# Altium PCB Morpheus_pill.PcbDoc
Units mm, origin at the board's own origin, x right, y up, seen from the top; angles counter-clockwise.
Board outline 20.57 x 20.57 mm, 4 copper layers (TOP, GND, SIG, BOT), stack 0.776 mm thick; 80 components, 67 nets, 256 pads, 130 vias.
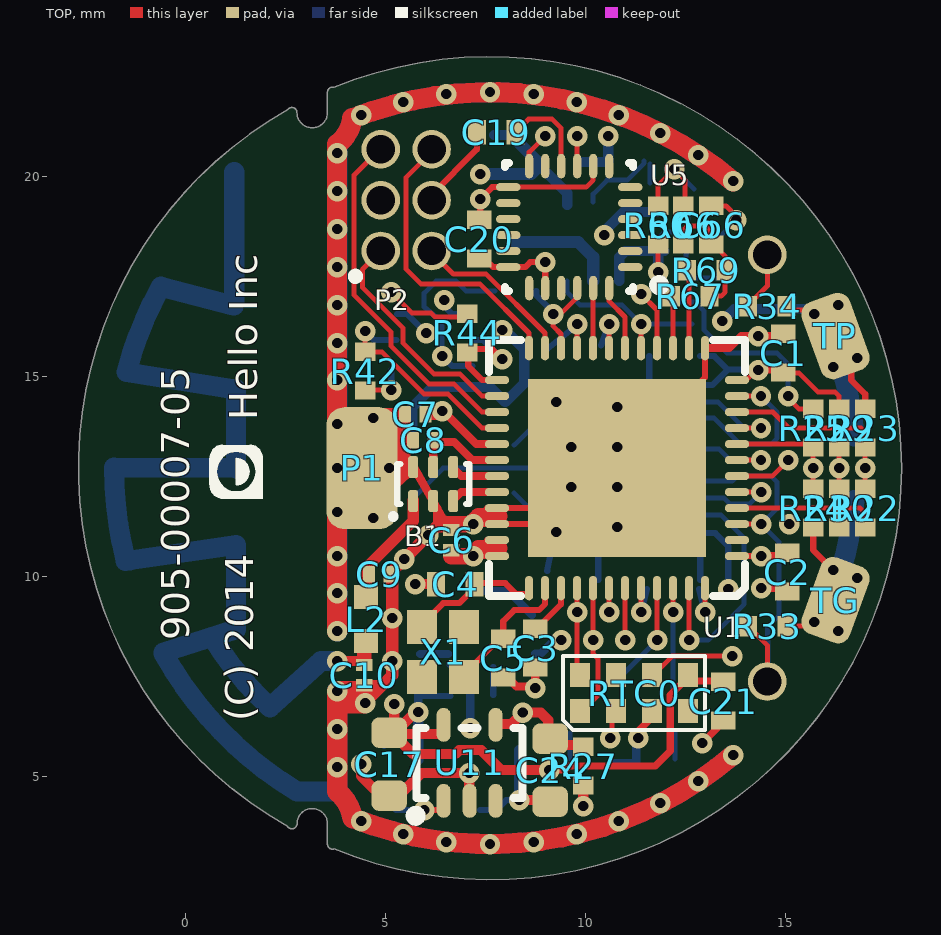
[diagram p0: TOP view]
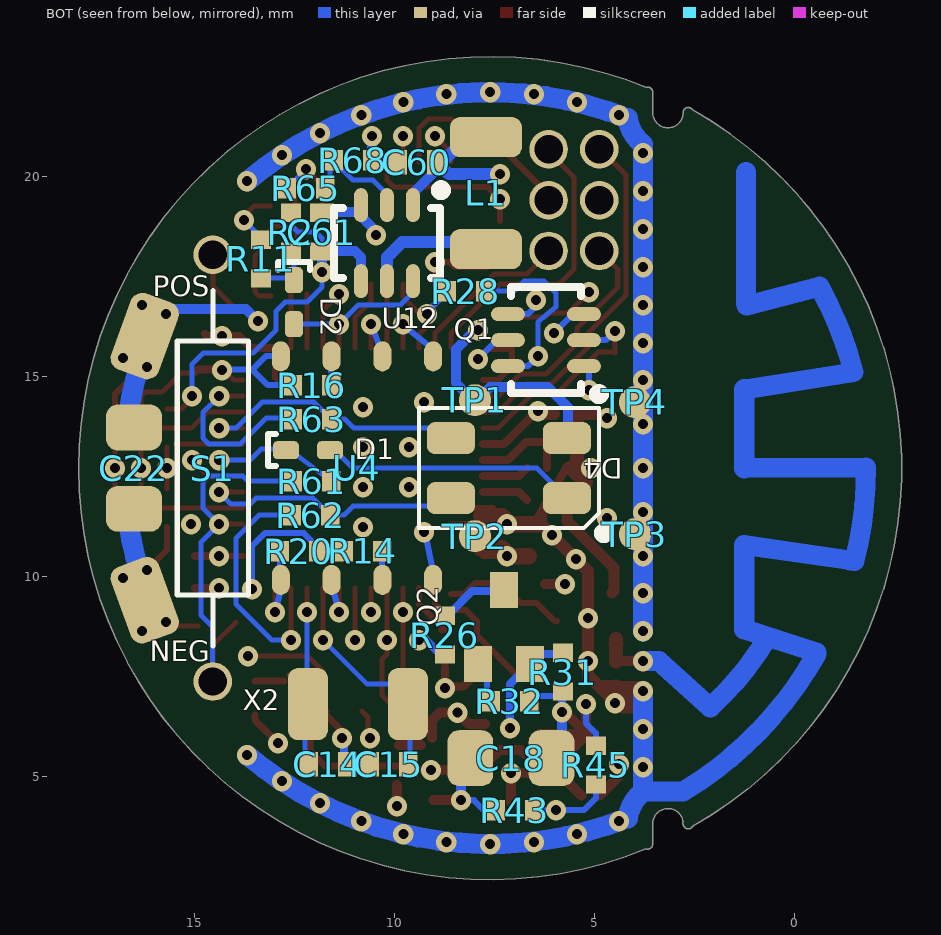
[diagram p1: BOT view, seen from below]
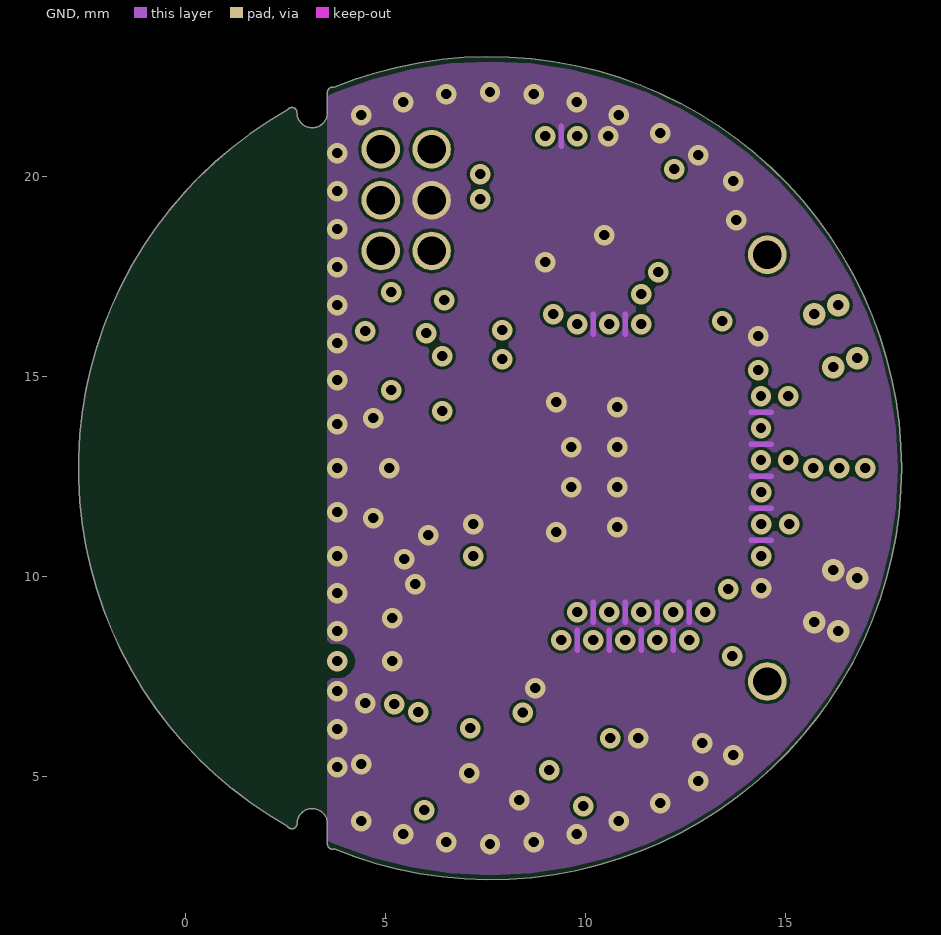
[diagram p2: GND]
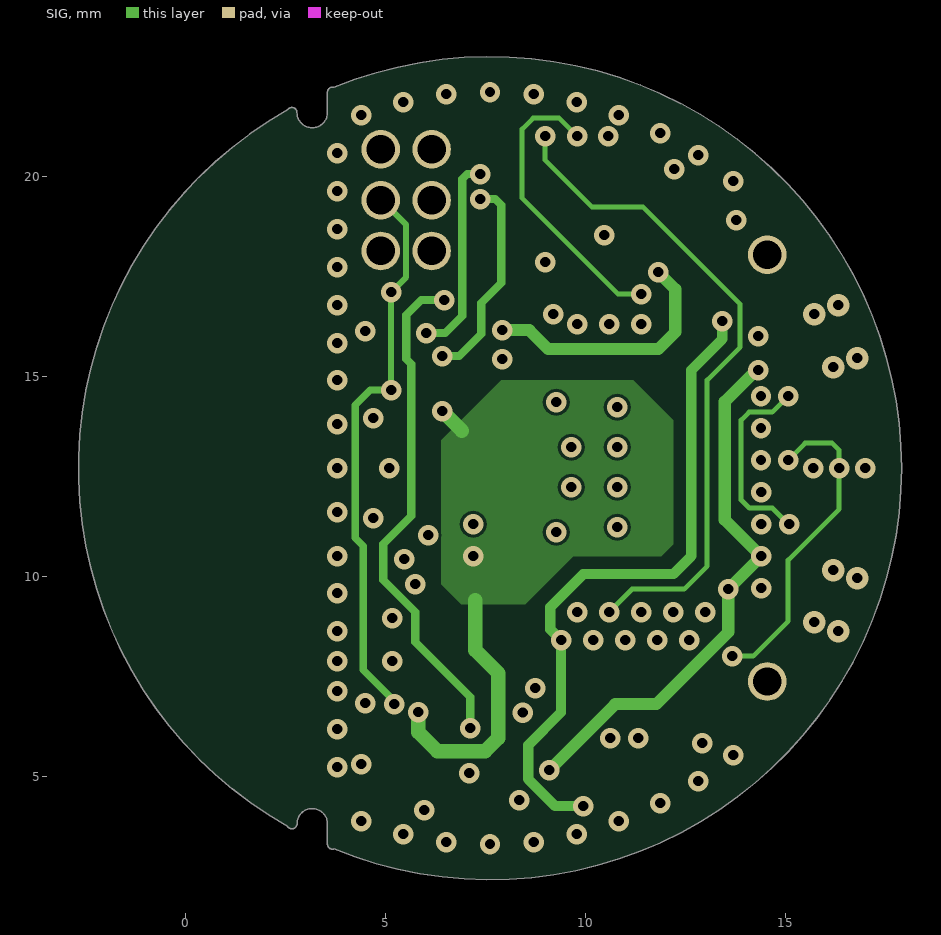
[diagram p3: SIG]

## Layer stack, top to bottom
Top Solder: solder mask 0.0102, Solder Resist, Dk 3.5
TOP: signal copper 0.0356
Dielectric1: prepreg 0.252, FR-4, Dk 4.8
GND: signal copper 0.0356
Dielectric2: core 0.13, FR-4, Dk 4.8
SIG: signal copper 0.0356
Dielectric3: prepreg 0.252, FR-4, Dk 4.8
BOT: signal copper 0.0356
Bottom Solder: solder mask 0.0102, Solder Resist, Dk 3.5

## Board outline
2.558,3.744 cw(c7.62,12.7) 2.558,21.656 cw(c2.667,21.59) 2.794,21.59 ccw(c3.175,21.59) 3.556,21.59 3.556,22.098 cw(c3.683,22.098) 3.721,22.22 cw(c7.62,12.7) 17.907,12.7 cw(c7.62,12.7) 3.721,3.18 cw(c3.683,3.302) 3.556,3.302 3.556,3.81 ccw(c3.175,3.81) 2.798,3.859 cw(c2.675,3.825) 2.802,3.825 cw(c2.675,3.825) 2.782,3.755 cw(c2.667,3.81)

## Design rules (kind name [scope] priority, off if disabled: settings)
Clearance "Gnd Polygon" [OnLayer('GND')] p1: gap=0.076
Clearance [All] p2: gap=0.075
ComponentClearance [All] p1: gap=0.127 collisioncheckmode=3 verticalgap=0.127 showdistances=FALSE
FabricationTestPointUsage TestPointUsage [All] p1: valid=0 allowmultiple=FALSE
FabricationTestpoint Testpoint [All] p1: side=3 testpointundercomponent=TRUE minsize=1.016 maxsize=2.54 preferedsize=1.524 minholesize=0 maxholesize=1.016 preferedholesize=0.813 testpointgrid=0.025 allowsidetop=TRUE allowsidebottom=TRUE usegrid=TRUE gridtolerance=0
HoleSize [All] p1: absolutevalues=TRUE maxlimit=6.35 minlimit=0.076 maxpercent=80.000 minpercent=20.000
MinimumAnnularRing [All] p1: minimumring=0.051
PasteMaskExpansion [All] p1: expansion=-0.025
PlaneClearance [All] p1: clearance=0.203
PlaneConnect [All] p1: planeconnectstyle=Direct reliefexpansion=0.635 reliefentries=4 reliefconductorwidth=0.508 reliefairgap=0.254
PolygonConnect [All] p1: connectstyle=Direct reliefconductorwidth=0.381 reliefentries=4 polygonreliefangle="45 Angle" airgapwidth=0.254
RoutingLayers [All] p1: top layer_v5=TRUE mid layer 1_v5=TRUE mid layer 2_v5=FALSE bottom layer_v5=TRUE
RoutingVias [All] p1: holewidth=0.305 width=0.559 viastyle="Through Hole" minholewidth=0.076 minwidth=0.203 maxholewidth=1.651 maxwidth=2.54
SilkToSolderMaskClearance SilkscreenOverComponentPads [IsPad] p1: minsilkscreentomaskgap=0.254 clearancetoexposedcopper=TRUE
SolderMaskExpansion [All] p1: expansion=0.076
Width [All] p1: maxlimit=10.16 minlimit=0.076 preferedwidth=0.254 toplayer_maxwidth=2.54 midlayer2_maxwidth=2.54 bottomlayer_maxwidth=5.08 minimp=50.000000 maximp=50.000000 favimp=50.000000
20 further rules are at their usual default settings.

## Classes and differential pairs
component class Power: C17 C18 C22 C24 C60 C61 C66 D1 D2 D4 L1 NEG POS Q1 Q2 R2 R11 R26 R27 R31 R32 R33 R34 R42 R43 R44 R45 R60 R61 R62 R63 R65 R66 R67 R68 R69 S1 TG TP TP1 TP2 TP3 TP4 U11 U12
component class Motion: C19 C20 R28 U5
component class Morpheus_pill: C9 C10 L2 P1 R14 R16 R20 R22 R23 R24 R25 R29 R30 U4
component class Bluetooth: B1 C1 C2 C3 C4 C5 C6 C7 C8 C14 C15 C21 P2 RTC0 U1 X1 X2

## Components (designator, comment, footprint, x,y, rotation, side; value= is the part's Value field where it differs from the comment)
B1 "2450BM14E0003" DFN50P160X80X70-6N 6.2,12.3 r90 top locked
C1 "0.1u" CAP0402_SENSE_DVT 14.95,15.575 r270 top
C2 "0.1u" CAP0402_SENSE_DVT 15.05,10.1 r90 top
C3 "0.1u" CAP0402_SENSE_DVT 8.75,8.2 r90 top
C4 "12p" CAP0402_SENSE_DVT 6.75,9.8 r0 top
C5 "12p" CAP0402_SENSE_DVT 7.95,7.95 r90 top
C6 "1000p" CAP0201_SENSE_DVT 6.65,10.9 r270 top
C7 "C_0.047u_10_16_X5R_0201" CAP0201_SENSE_DVT 5.75,14.05 r0 top
C8 "2200p" CAP0201_SENSE_DVT 5.95,13.4 r0 top
C9 "DNP" CAP0201_SENSE_DVT 4.85,10.05 r0 top
C10 "" CAP0201_SENSE_DVT 4.475,7.525 r270 top
C14 "12p" CAP0402_SENSE_DVT 11.675,5.3 r0 bottom
C15 "12p" CAP0402_SENSE_DVT 10.15,5.3 r180 bottom
C17 "4.7u" CAP0603_SENSE_DVT 5.1,5.3 r90 top locked
C18 "47u" CAP0805_SENSE_DVT 7.1,5.45 r180 bottom
C19 "0.1u" CAP0402_SENSE_DVT 7.775,21.1 r0 top
C20 "0.1u" CAP0402_SENSE_DVT 7.35,18.425 r90 top
C21 "DNP" CAP0402_SENSE_DVT 13.45,6.875 r90 top
C22 "47u" CAP0805_SENSE_DVT 16.525,12.7 r90 bottom
C24 "4.7u" CAP0603_SENSE_DVT 9.125,5.15 r90 top
C60 "1u" CAP0402_SENSE_DVT 9.45,20.35 r180 bottom
C61 "1u" CAP0402_SENSE_DVT 11.825,18.6 r270 bottom
C66 "0.01uF" CAP0402_SENSE_DVT 13.15,18.775 r270 top
D1 "DNP" SOD523 12.175,13.15 r180 bottom
D2 "DNP" SOD523 12.525,16.85 r270 bottom
D4 "DNP" PLCC150X290P280X320X190-4 7.15,12.7 r180 bottom
L1 "DNP" IND_1206 7.725,19.575 r270 bottom locked
L2 "" IND_0402 4.525,8.925 r270 top
NEG "DNP" TP0875x050#1 19.525,4.5 r180 bottom (schematic designator BG)
P1 "Contact Spring" TP120X70SC 4.5,12.85 r90 top locked
P2 "DNP" HDR1.27-2X3-N 5.525,19.4 r270 top locked
POS "DNP" TP0875x050#2 22.3,4.2 r180 bottom (schematic designator BP)
Q1 "NTJD4152PT1G" SOT65P212X110-6N 6.225,15.9 r0 bottom locked
Q2 "DNP" SOT-323 7.275,8.725 r180 bottom locked
R2 "DNP" RES0402_SENSE_DVT 12.6,18.6 r270 bottom
R11 "DNP" RES0402_SENSE_DVT 13.35,17.925 r270 bottom
R14 "DNP" RES0402_SENSE_DVT 10.8,10.625 r0 bottom
R16 "DNP" RES0402_SENSE_DVT 12.075,14.775 r0 bottom
R20 "DNP" RES0402_SENSE_DVT 12.4,10.625 r180 bottom
R22 "215K" RES0402_SENSE_DVT 17,11.7 r90 top
R23 "523k" RES0402_SENSE_DVT 17,13.7 r90 top
R24 "215K" RES0402_SENSE_DVT 15.7,11.7 r90 top
R25 "523k" RES0402_SENSE_DVT 15.7,13.7 r90 top
R26 "DNP" RES0402_SENSE_DVT 8.75,8.525 r90 bottom
R27 "10" RES0402_SENSE_DVT 9.95,5.25 r90 top
R28 "510K" RES0402_SENSE_DVT 8.225,17.125 r180 bottom
R29 "523k" RES0402_SENSE_DVT 16.35,13.7 r90 top
R30 "523k" RES0402_SENSE_DVT 16.35,11.7 r90 top
R31 "" RES0402-SENSE-DVT 5.8,7.6 r270 bottom
R32 "DNP" RES0402_SENSE_DVT 7.125,6.875 r180 bottom
R33 "1.3M" RES0402_SENSE_DVT 14.55,8.75 r180 top
R34 "1.3M" RES0402_SENSE_DVT 14.55,16.75 r0 top
R42 "1.3M" RES0402_SENSE_DVT 4.5,15.125 r270 top
R43 "DNP" RES0402_SENSE_DVT 7,4.15 r180 bottom
R44 "1.3M" RES0402_SENSE_DVT 7.05,16.075 r90 top
R45 "DNP" RES0402_SENSE_DVT 4.975,5.275 r90 bottom
R60 "499k" RES0402_SENSE_DVT 11.825,18.775 r270 top
R61 "511" RES0402_SENSE_DVT 12.075,12.375 r180 bottom
R62 "511" RES0402_SENSE_DVT 12.1,11.525 r180 bottom
R63 "511" RES0402_SENSE_DVT 12.075,13.925 r180 bottom
R65 "499k" RES0402_SENSE_DVT 12.225,19.7 r0 bottom
R66 "499k" RES0402_SENSE_DVT 12.45,18.775 r90 top
R67 "100k" RES0402_SENSE_DVT 12.625,17 r0 top
R68 "294k" RES0402_SENSE_DVT 11.05,20.4 r0 bottom
R69 "294k" RES0402_SENSE_DVT 13.025,17.65 r0 top
RTC0 "DNP" 8-CLCC 11.225,7.075 r0 top locked
S1 "REED_SPST_NO" REED-10x1.8 14.554,12.7 r270 bottom locked
TG "DNP" TP0875x050#3 19.625,9.075 r180 top
TP "DNP" TP0875x050#4 20.275,16.3 r180 top
TP1 "DNP" TP-0.8 8,14.4 r90 bottom
TP2 "DNP" TP-0.8 8,11 r90 bottom
TP3 "DNP" TP-0.8 4,11.05 r0 bottom
TP4 "DNP" TP-0.8 4,14.35 r90 bottom
U1 "nRF51422-QFAA" VQFN40P600X600X100-48 10.795,12.7 r180 top locked
U4 "DNP" DFN127P600x500x80-8D 10.95,12.7 r90 bottom locked
U5 "InvenSense MPU-6500" QFN-24 9.6,18.725 r180 top locked
U11 "TPS79718DCK" SOT65P212X110-5N 7.112,5.334 r90 top locked
U12 "DNP" SOT65P212X110-6N 10.2,18.325 r270 bottom locked
X1 "ILCX19" ILCX19 5.55,9.15 r270 top
X2 "FC-135 32.7680KA-AC3" Epson_FC-135 10.925,6.8 r180 bottom locked

## Footprints (in the part's own frame and the unit in brackets; to place one, negate y for a bottom-side part, rotate by r counter-clockwise, add the part's x,y. Pads: shape width x height; smd on the part's side, far side on the other; paste and mask are expansions set on the pad)
8-CLCC [mm] "8 lead CLCC package, 2.3 x 1.5mm"
  rect 0.5x0.6 smd: 1(-1.35,-0.45) 2(-0.45,-0.45) 3(0.45,-0.45) 4(1.35,-0.45) 5(1.35,0.45) 6(0.45,0.45) 7(-0.45,0.45) 8(-1.35,0.45)
  silkscreen extent -1.78,-0.92 1.78,0.92, body extent -1.6,-0.75 1.6,0.75, height 0.8
CAP0201_SENSE_DVT [mil] "Chip Capacitor, 2-Leads, Body 0201 / 0.60x0.30mm, IPC High Density"
  rect 12x16 smd mask+1.97: 1(-10,0) 2(10,0)
  body extent -12,-6 12,6, height 13
CAP0402_SENSE_DVT [mil] "Chip Capacitor, 2-Leads"
  rect 18x24 smd: 1(-19,0) 2(19,0)
  body extent -21,-11 21,11, height 22
CAP0603_SENSE_DVT [mil] "Chip Capacitor, 2-Leads"
  rrect50% 30x35 smd: 1(-31,0) 2(31,0)
  body extent -31,-16 32,16, height 31
CAP0805_SENSE_DVT [mil] "Chip Capacitor, 2-Leads"
  rrect50% 45x55 smd: 1(-40,0) 2(40,0)
  body extent -39,-25 39,25, height 20
DFN50P160X80X70-6N [mm] "DFN, 6-Leads, body 1.6x0.8mm (max), Pitch 0.50mm"
  rrect50% 0.55x0.25 smd: 1(-0.425,0.5) 2(-0.425,0) 3(-0.425,-0.5) 4(0.425,-0.5) 5(0.425,0) 6(0.425,0.5)
  silkscreen extent -0.83,-0.9 0.5,1, body extent -0.41,-0.8 0.41,0.8, height 0.62
DFN127P600x500x80-8D [mm] "WSON 8L 6.0x5.0x0.8mm"
  oval 0.75x0.45 smd: 1(-2.794,1.905) 2(-2.794,0.635) 3(-2.794,-0.635) 4(-2.794,-1.905) 5(2.794,-1.905) 6(2.794,-0.635) 7(2.794,0.635) 8(2.794,1.905)
Epson_FC-135 [mm] "Epson Crystal FC-135 series"
  rrect50% 1x1.8 smd: 1(-1.25,0) 2(1.25,0)
  body extent -1.6,-0.75 1.6,0.75, height 1.1
HDR1.27-2X3-N [mil] "CONNECTOR, PCB, 2X3, 1.27MM, VERT, TH"
  round 38 hole 28 paste-39.37: 1(50,-25) 2(50,25) 3(0,-25) 4(0,25) 5(-50,-25) 6(-50,25)
  silkscreen extent 72,-53 78,-47
ILCX19 [mm] "ILSI ILCX19 Crystal Oscillator 2.0 x 1.6 x 0.45mm"
  rect 0.85x0.75 smd: 1(0.425,0.375) 2(1.675,0.375) 3(1.675,1.425) 4(0.425,1.425)
  body extent 0.05,0.1 2.05,1.7, height 0.45
IND_0402 [mm] "Chip Inductor, 2-Leads, Body 1.00x0.50mm, IPC Medium Density"
  rect 0.6x0.6 smd mask+0.05: 1(-0.55,0) 2(0.55,0)
  body extent -0.52,-0.28 0.53,0.27, height 0.55
IND_1206 [mm] "Chip Inductor, 2-Leads, Body 1206 / 3.20x1.60mm, IPC High Density"
  rrect50% 1x1.8 smd: 1(-1.4,0) 2(1.4,0)
  body extent -1.63,-0.8 1.65,0.8, height 1.6
PLCC150X290P280X320X190-4 [mm] "PLCC, 4-Leads, body 0.280x0.320mm (max), Pitch 1.50x2.90mm,  Height 1.90mm"
  rrect50% 1.2x0.8 smd: 1(1.45,-0.75) 2(1.45,0.75) 3(-1.45,0.75) 4(-1.45,-0.75)
  silkscreen extent -2.25,-1.75 2.5,1.5, body extent -1.6,-1.4 1.6,1.4, height 2
QFN-24 [mm]
  oval 0.61x0.203 smd: 1(-1.525,1) 2(-1.525,0.6) 3(-1.525,0.2) 4(-1.525,-0.2) 5(-1.525,-0.6) 6(-1.525,-1) 13(1.525,-1) 14(1.525,-0.6) 15(1.525,-0.2) 16(1.525,0.2) 17(1.525,0.6) 18(1.525,1)
  oval 0.203x0.61 smd: 7(-1,-1.525) 8(-0.6,-1.525) 9(-0.2,-1.525) 10(0.2,-1.525) 11(0.6,-1.525) 12(1,-1.525) 19(1,1.525) 20(0.6,1.525) 21(0.2,1.525) 22(-0.2,1.525) 23(-0.6,1.525) 24(-1,1.525)
  TOP pour cut-out: -1.35,1.35 -1.35,-1.35 1.35,-1.35 1.35,1.35
  silkscreen extent -2.38,-1.6 1.6,1.6, body extent -1.45,-1.45 1.45,1.45, height 0.95
REED-10x1.8 [mil]
  round 38 hole 28 paste-39.37: 1(-210,0) 2(210,0)
  silkscreen extent -175,-35 175,35
RES0402-SENSE-DVT [mil] "Chip resistor 0402"
  rect 18x20 smd: 1(-19,0) 2(19,0)
  body extent -24,-8 24,8, height 20
RES0402_SENSE_DVT [mil] "Chip resistor 0402"
  rect 18x20 smd: 1(-19,0) 2(19,0)
  body extent -24,-8 24,8, height 20
SOD523 [mm] "Diode small package"
  rrect50% 0.65x0.45 smd: 1(-0.55,0) 2(0.55,0)
  silkscreen extent -1,-0.4 -0.8,0.4, body extent -0.6,-0.4 0.6,0.4, height 0.65
SOT65P212X110-5N [mm] "SOT23, 5-Leads, Body 2.3x2.3mm (max), Pitch 0.65mm, IPC Medium Density"
  oval 0.85x0.35 smd: 1(-0.95,0.65) 2(-0.95,0) 3(-0.95,-0.65) 4(0.95,-0.65) 5(0.95,0.65)
  silkscreen extent -1.45,-1.33 0.88,1.47, body extent -0.67,-1.12 0.67,1.13, height 1.1
SOT65P212X110-6N [mm] "SOT23, 6-Leads, Body 2.3x2.3mm (max), Pitch 0.65mm, IPC Medium Density"
  oval 0.85x0.35 smd: 1(-0.95,0.65) 2(-0.95,0) 3(-0.95,-0.65) 4(0.95,-0.65) 5(0.95,0) 6(0.95,0.65)
  silkscreen extent -1.45,-1.33 0.87,1.47, body extent -0.67,-1.12 0.67,1.13, height 1.1
SOT-323 [mm]
  rect 0.7x0.9 smd paste-0.05: 1(-0.65,-0.925) 2(0.65,-0.925) 3(0,0.925)
  body extent -1.1,-0.8 1.1,0.8, height 1.1
TP120X70SC [mm] "Test Pad 120x70 mils (for spring contact)"
  rrect50% 3.048x1.778 smd mask-0.1: 1(-0.15,0.08)
TP0875x050#1 [mil] "Test Pad 0.875x0.50mm"
  rrect50% 50x80 smd rot 20 paste-40: 1(128.7,192.83)
TP0875x050#2 [mil] "Test Pad 0.875x0.50mm"
  rrect50% 50x80 smd rot 160 paste-40: 1(237.95,464.65)
TP0875x050#3 [mil] "Test Pad 0.875x0.50mm"
  rrect50% 50x80 smd rot 160 paste-40: 1(132.64,-12.72)
TP0875x050#4 [mil] "Test Pad 0.875x0.50mm"
  rrect50% 50x80 smd rot 20 paste-40: 1(158.23,11.73)
TP-0.8 [mm] "0.8mm test point"
  round 0.8 smd paste-1 mask-1: 1(0,0)
VQFN40P600X600X100-48 [mm]
  rect 4.445x4.445 smd: 0(0,0)
  oval 0.61x0.203 smd: 1(-3,2.2) 2(-3,1.8) 3(-3,1.4) 4(-3,1) 5(-3,0.6) 6(-3,0.2) 7(-3,-0.2) 8(-3,-0.6) 9(-3,-1) 10(-3,-1.4) 11(-3,-1.8) 12(-3,-2.2) 25(3,-2.2) 26(3,-1.8) 27(3,-1.4) 28(3,-1) 29(3,-0.6) 30(3,-0.2) 31(3,0.2) 32(3,0.6) 33(3,1) 34(3,1.4) 35(3,1.8) 36(3,2.2)
  oval 0.203x0.61 smd: 13(-2.2,-3) 14(-1.8,-3) 15(-1.4,-3) 16(-1,-3) 17(-0.6,-3) 18(-0.2,-3) 19(0.2,-3) 20(0.6,-3) 21(1,-3) 22(1.4,-3) 23(1.8,-3) 24(2.2,-3) 37(2.2,3) 38(1.8,3) 39(1.4,3) 40(1,3) 41(0.6,3) 42(0.2,3) 43(-0.2,3) 44(-0.6,3) 45(-1,3) 46(-1.4,3) 47(-1.8,3) 48(-2.2,3)
  silkscreen extent -3.2,-3.2 3.2,3.2

## Part data
B1: "2.45 GHz Impedance Matched Balun-Filter"
C1 C2 C3 C19 C20 C21: library part C_0.1u_10_50_X7R_0402, "Chip capacitor"
C4 C5 C14 C15: library part C_12p_5_50_C0G_0402, "Chip capacitor"
C6: library part C_1000p_10_25_X7R_0201, "Chip capacitor"
C7: "Chip capacitor"
C8: library part C_2200p_5_16_X7R_0201, "Chip capacitor"
C9: library part C_2.2p_5_25_C0G_0201, "Chip capacitor"
C10: library part C_0.4p_5_25_NP0_0201, "Chip capacitor"
C17 C24: library part C_4.7u_20_10_X5R_0603, "Chip capacitor"
C18 C22: library part C_47u_20_10_X5R_0805, "Chip capacitor"
C60 C61: library part C_1u_10_6.3_X5R_0402, "Chip capacitor"
C66: library part C_10000p_10_50_X7R_0402, "Chip capacitor"
D1: library part 1N4148XTPM, "Silicon diode, 30V 200mA"
D2: library part RB520S30T1, "Schottky diode, 30V 200mA"
D4: library part CLV1A-FKB, "RGB LED Array"
L1: library part L_2.2u_1206, "SMD power inductor, 2.2uH"
L2: library part L_5.6n_0.1_?_270_300_?, "SMD RF inductor 2.2nH"
NEG POS TG TP: library part 5016, "Single-pad test point"
P1: library part TP-120X70-SC, "Test Pad 120x70 mil ( contact spring )"
P2: library part HDR1.27-2x3-N
Q1: "Vishay Dual N-Channel MOSFET 1.2v drive 20V 0.88A"
Q2: library part MMST2222A, "NPN Transistor, 20V, 600mA"
R2 R32: library part R_1k_1_0.1_0402, "Chip Resistor"
R11 R67: library part R_100k_1_0.1_0402, "Chip Resistor"
R14 R16 R20 R23 R25 R29 R30: library part R_523k_1_0.1_0402, "Chip Resistor"
R22 R24: library part R_215K_1_0.1_0402, "Chip Resistor"
R26 R27: library part R_10_1_0.1_0402, "Chip Resistor"
R28: library part R_510K_5_0.1_0402, "Chip Resistor"
R31: library part R_0_jumper_0.1_0402, "Chip Resistor"
R33 R34 R42 R44: library part R_1.3M_5_0.1_0402, "Chip Resistor"
R43: library part R_887k_1_0.1_0402, "Chip Resistor"
R45 R60 R65 R66: library part R_499k_1_0.1_0402, "Chip Resistor"
R61 R62 R63: library part R_511_1_0.1_0402, "Chip Resistor"
R68 R69: library part R_294k_1_0.1_0402, "Chip Resistor"
RTC0: library part AB-RTCMC-32.768kHz-AIGZ, "Abracon I2C RTC w/ integrated XO"
S1: library part SW_REED_SPST_NO, "SWITCH REED SPST NO"
TP1 TP2 TP3 TP4: library part TP-0.8, "testpoint"
U1: library part nRF51422_QFAA, "Multi-protocol Bluetooth Low Energy, ANT and 2.4GHz proprietary system-on-chip"
U4: library part FM25VN10-G, "Cypress SPI FRAM 128Kx8"
U5: library part MPU-6500, "InvenSense MPU-6500 6-axis accelerometer and gyroscope"
U11: "LDO 1.8V SC70-5"
U12: library part TPS61220, "Boost Converter"
X1: "ILSI ILCX19 Crystal Oscillator"
X2: library part "Espon_FC-135 32.7680KA-AC3", "Epson 32kHz crystal, 9pF"

## Via types
v1: diameter 0.508, hole 0.254, TOP to BOT, tented both sides, 114 vias
v2: diameter 0.508, hole 0.254, TOP to BOT, tented bottom, 8 vias
v3: diameter 0.559, hole 0.254, TOP to BOT, 8 vias

## Nets (pads, with @x,y where several pads share a name; then routed paths per layer and width w, separated by ;. In a path a pad name is that pad's centre, name@x,y a point inside that pad or via, vN(x,y) a via of type N, cw(c..) or ccw(c..) an arc to the next point about the centre after c; other vN are vias at no path point)
AIN0: C15.2 U1.45 X2.2 | length 4.3
  TOP w0.127: v1@11.795,8.4 U1.45
  BOT w0.127: C15.2@9.625,5.425 X2.2@9.625,6.075 ; X2.2@9.95,7.3 10.695,7.3 v1@11.795,8.4
  other v1: 11.8,8.4
AIN1: C14.2 U1.46 X2.1 | length 3.6
  TOP w0.127: U1.46 12.195,9.1 v1@12.201,9.094
  BOT w0.127: X2.1@12.195,6.8 v1@12.195,9.1 ; C14.2@12.25,5.425 X2.1@12.25,6.075
  other v1: 12.2,9.1
AIN2: D4.4 R62.2 U1.5 | length 7.4
  TOP w0.127: U1.5 v1(14.4,12.1)
  BOT w0.127: D4.4@8.225,12.075 8.55,11.75 11.05,11.75 11.275,11.525 11.625,11.525 12.05,11.95 13.475,11.95 13.625,11.8 14.1,11.8 v1(14.4,12.1)
AIN3: R29.1 R30.2 RTC0.6 U1.6 | length 12.7
  TOP w0.127: RTC0.6@11.825,7.525 11.825,7.65 12.175,8 v1(13.675,8) ; U1.6 14.675,12.5 v1(15.075,12.9) ; R30.2@16.35,12.275 R29.1@16.35,13.325
  SIG w0.127: v1(13.675,8) 14.2,8 15.075,8.875 15.075,10.4 16.35,11.675 16.35,13.15 16.175,13.325 15.5,13.325 v1(15.075,12.9)
  other v1: 16.35,12.7
AIN4: D1.1 R61.2 U1.7 | length 3.8
  TOP w0.127: U1.7 v1(14.395,12.9)
  BOT w0.127: R61.2@11.6,12.375 D1.1@12.625,13.15 ; D1.1@12.625,13.175 13.35,13.175 13.625,12.9 v1(14.395,12.9)
AIN5: R24.2 R25.1 U1.8 | length 2.7
  TOP w0.127: U1.8 R25.1@15.475,13.3 ; R24.2@15.7,12.175 R25.1@15.7,13.225
  other v1: 15.7,12.7
AIN6: D4.3 R63.2 U1.9 | length 7.5
  TOP w0.127: U1.9 v1(14.395,13.7)
  BOT w0.127: D4.3@8.225,13.275 8.65,13.7 11.025,13.7 11.25,13.925 11.6,13.925 12.025,14.35 13.325,14.35 13.975,13.7 v1(14.395,13.7)
AIN7: R22.2 R23.1 U1.10 | length 4.8
  TOP w0.127: U1.10 14.695,14.1 15.095,13.7 16.9,13.7 17,13.6 R22.2@17,12.175
  other v1: 17,12.7
ANT1: B1.4 U1.31 | length 1.2
  TOP w0.203: B1.4@6.7,12.7 6.9,12.5 U1.31
ANT2: B1.3 U1.32 | length 1.2
  TOP w0.203: B1.3@6.7,11.9 6.9,12.1 U1.32
AUX_SCL: U5.7
AUX_SDA: U5.21
BLE_ANT: C10.1 L2.2 | length 35.8
  TOP w0.254: v1(3.8,7.875) C10.1@4.475,7.875
  TOP w0.356: C10.1@4.475,7.875 L2.2@4.475,8.425
  BOT w0.5: -1.487,10.379 cw(c7.62,12.7) -1.778,12.716 1.27,12.7 ; -1.377,10.397 1.27,10.775 ; -0.544,8.088 1.27,8.672 ; -0.542,8.064 ccw(c7.657,12.657) 2.798,4.612 ; 0.681,8.467 ccw(c7.62,12.7) 2.121,6.715 ; 1.215,16.763 -0.61,17.238 ccw(c7.62,12.7) -1.467,15.098 1.256,14.668 ; 2.116,6.72 3.4,7.873 v1(3.8,7.875) ; 2.798,4.616 3.793,4.616
  BOT w0.508: 1.225,16.825 1.225,20.103 ; 1.27,8.672 1.27,10.775 ; 1.27,12.7 1.27,14.675
BLE_OUT: B1.1 C9.1 L2.1 | length 2.8
  TOP w0.279: L2.1@4.575,9.575 4.525,9.625 4.525,10.2 5.7,11.375 B1.1@5.7,11.9
CLK: RTC0.2 | length 0.8
  TOP w0.127: v1(10.625,5.95) 10.675,6 10.675,6.475 RTC0.2@10.825,6.625
D2K: D2.1 R2.2 R11.2 | length 1.6
  BOT w0.127: R2.2@12.625,18.167 12.525,18.067 12.525,17.45 R11.2@13.375,17.45
DCC: U1.2
DEC1: C3.2 U1.39 | length 1.4
  TOP w0.152: C3.2@8.754,8.654 9.395,9.295 U1.39 ; C3.2@8.804,8.654 C3.2@8.854,8.654
FA: C66.2 R66.1 R67.2 R69.2 | length 3.3
  TOP w0.127: R66.1@12.45,18.3 12.45,18.65 12.55,18.75 13.017,18.75 13.125,18.642 13.125,18.292 13.208,18.292 13.5,18 13.5,17.1 13.4,17 R67.2@13.1,17
FB: R65.1 R68.2 U12.2 | length 2.3
  BOT w0.127: U12.2@10.2,19.35 10.2,19.55 10.55,19.9 11.05,19.9 11.475,20.325 R68.2@11.475,20.375 ; R65.1@11.625,19.825 R68.2@11.625,20.3
FC: R60.1 R65.2 R66.2 | length 2.8
  TOP w0.127: R60.1@11.825,19.25 11.825,19.775 v1(12.225,20.175) 12.5,19.9 R66.2@12.5,19.308
  BOT w0.127: v1(12.225,20.175) R65.2@12.725,19.675
FLASH_MISO: U1.44 U4.2 | length 1.2
  TOP w0.127: v1@11.395,9.1 U1.44
  BOT w0.152: v1@11.395,9.1 U4.2@11.545,9.675
  other v1: 11.4,9.1
FLASH_MOSI: U1.21 U4.5 | length 1.6
  TOP w0.127: U1.21 v1@9.795,16.3
  BOT w0.127: v1@9.8,16.275 v1(9.8,16.3)
  BOT w0.152: U4.5@9.06,15.685 v1@9.8,16.275
FLASH_RST: R16.1 U4.7 | length 0.7
  BOT w0.152: R16.1@11.6,14.775 U4.7@11.6,15.5
FLASH_SCLK: U1.19 U4.6 | length 1.2
  TOP w0.127: U1.19 v1@10.595,16.3
  BOT w0.152: U4.6@10.395,15.765 v1@10.595,16.3
  other v1: 10.6,16.3
FLASH_WPT: R14.1 U4.3 | length 0.9
  BOT w0.127: U4.3@10.325,9.905 U4.3@10.33,9.9
  BOT w0.152: U4.3@10.325,9.905 R14.1@10.325,10.75
FS: L1.2 U12.5 | length 2.7
  BOT w0.305: L1.2@8.25,18.35 9.825,18.35 10.2,17.975 U12.5
FSYNC: U5.11
GND: B1.2 B1.6 C1.1 C2.1 C3.1 C4.1 C5.1 C6.1 C7.1 C8.1 C9.2 C10.2 C14.1 C15.1 C17.1 C18.1 C19.1 C20.1 C21.1 C22.1 C24.1 C60.1 C61.1 C66.1 NEG.1 P1.1 P2.4 R11.1 R24.1 R33.1 R43.1 R68.1 RTC0.3 TG.1 TP3.1 TP4.1 U1.0 U1.13 U1.33 U1.34 U4.4 U5.18 U5.20 U11.2 U12.3 | length 127.3
  TOP w0.127: C66.1@13.125,19.258 13.517,19.258 13.775,19 v1(13.775,18.9) ; 13.3,5.25 13.3,5.375 ; R33.1@14.925,8.75 TG.1@15.55,8.75
  TOP w0.152: P2.4@6.16,19.535 7.292,20.667 C19.1 ; C20.1 C20.1@7.358,17.942 ; C20.1@7.483,17.942 7.7,17.725 U5.18@8.05,17.725 ; U5.18 8.5,17.725 8.625,17.85 v1(9,17.85) U5.20@9,17.275 ; U1.0@8.595,11.3 U1.34 7.175,11.3 7.175,11.325 7.55,11.7 U1.33 U1.0@8.595,11.7 ; U1.0@12.603,14.605 12.63,14.605 12.995,14.97 U1.13 ; R24.1@15.7,11.225 15.7,10.65 v3(16.2,10.15)
  TOP w0.178: v1(11.325,5.95) 11.325,6.125 11.725,6.525 RTC0.3@11.725,6.625 ; v1(12.925,5.825) C21.1@13.484,6.384 ; C21.1@13.5,6.425 C21.1@13.5,6.525
  TOP w0.203: P2.4 P2.4@6.16,19.535 ; 6.3,11.25 B1.2@6.3,11.696 ; C5.1 8.058,7.467 8.287,7.238 8.75,7.238 C3.1@8.75,7.725 ; U1.13 13.6,15.7 13.9,16 14.7,16 C1.1@14.75,16.05 ; v1(14.4,9.7) C2.1@15,9.7
  TOP w0.205: B1.6@5.7,12.75 C6.1@6.521,11.305
  TOP w0.254: v1(4.4,5.3) 4.4,5 C17.1@4.887,4.513 ; C10.2 4.95,7.271 ; C17.1@5.338,4.513 5.9,5.075 v1(7.1,5.075) U11.2@7.1,4.35 ; v1(5.75,9.8) C4.1@6.242,9.8 ; v1(8.35,4.4) C24.1@9.03,4.4
  TOP w0.305: v1@4.475,6.825 5.175,7.525 5.175,10.125 6.44,11.39 ; P1.1@4.95,14.05 C7.1@5.446,14.05
  TOP w0.356: P1.1@5.075,12.7 B1.6@5.625,12.7 ; P1.1@5.225,12.35 5.5,12.6 ; 5.45,12.9 C7.1@5.45,14.05
  TOP w0.381: v1@4.475,6.825 C10.2@4.475,7.221
  TOP w0.406: 6.4,11.3 v1(7.2,11.3) ; v1@7.2,11.375 7.325,11.5 7.85,11.5
  TOP w0.5: v1(3.8,8.625) v1@3.8,20.8
  TOP w0.508: 3.793,4.616 cw(c3.175,3.81) v1@4.182,3.947 ; 3.8,4.625 v1(3.8,7.125) ; 3.8,6.825 v1@4.475,6.825 ; v1@3.812,20.798 ccw(c3.175,21.59) v1@4.179,21.435 ; v1@3.812,7.125 C10.2@4.487,7.125 ; v1@4.176,21.444 cw(c7.62,12.7) v1@13.696,19.87 ; v1@4.184,3.953 ccw(c7.62,12.7) v1@13.696,5.53
  GND w0.14: 9.4,20.75 9.4,21.25 ; 9.8,8.15 9.8,8.65 ; 10.2,8.85 10.2,9.35 ; 10.2,16.05 10.2,16.55 ; 10.6,8.15 10.6,8.65 ; 11,8.85 11,9.35 ; 11,16.05 11,16.55 ; 11.4,8.15 11.4,8.65 ; 11.8,8.85 11.8,9.35 ; 12.2,8.15 12.2,8.65 ; 12.6,8.85 12.6,9.35 ; 14.15,10.9 14.65,10.9 ; 14.15,11.7 14.65,11.7 ; 14.15,12.5 14.65,12.5 ; 14.15,13.3 14.65,13.3 ; 14.15,14.1 14.65,14.1
  BOT w0.127: R11.1@13.275,18.4 v1(13.775,18.9)
  BOT w0.152: R43.1@7.375,4.15 7.775,4.15 8.025,4.4 v1(8.35,4.4) ; U4.4@9.05,10.125 v2@9.275,11.225
  BOT w0.203: C15.1@10.633,5.325 11.275,5.325 11.275,5.9 v1(11.325,5.95)
  BOT w0.254: v1(8.35,4.4) C18.1@8.35,5.65 ; C60.1 R68.1@10.575,20.35 ; v1@10.513,18.663 10.95,19.1 C61.1@11.792,19.1 ; R68.1@10.575,20.4 v1(10.575,21)
  BOT w0.508: 3.793,4.616 cw(c3.175,3.81) v1@4.182,3.947 ; 3.8,4.616 v1(3.8,7.125) ; v1(3.8,8.625) v1@3.8,20.798 ; v1@3.812,20.798 ccw(c3.175,21.59) v1@4.179,21.435 ; v1@4.176,21.444 cw(c7.62,12.7) v1@13.696,19.87 ; v1@4.184,3.953 ccw(c7.62,12.7) v1@13.696,5.53 ; NEG.1@16.213,9.573 ccw(c7.62,12.7) C22.1@16.729,11.903
  other v1: 7.62,3.3 6.525,3.35 8.715,3.35 5.45,3.55 9.79,3.55 4.4,3.875 10.84,3.875 11.875,4.325 12.825,4.875 3.8,5.225 13.7,5.525 3.8,6.175 4.5,6.825 8.75,7.2 5.175,7.875 5.175,8.95 3.8,9.575 5.475,10.425 3.8,10.5 6.075,11.025 4.7,11.45 3.8,11.6 3.8,12.7 5.1,12.7 3.8,13.8 4.7,13.95 3.8,14.9 3.8,15.825 14.325,16 3.8,16.775 3.8,17.725 10.475,18.525 3.8,18.675 3.8,19.625 13.7,19.875 12.825,20.525 3.8,20.575 11.875,21.075 4.4,21.525 10.84,21.525 5.45,21.85 9.79,21.85 6.525,22.05 8.715,22.05 7.62,22.1
  other v2: 9.275,11.1 10.8,11.225 9.65,12.225 10.8,12.225 9.65,13.225 10.8,13.225 10.8,14.225 9.275,14.35
  other v3: 16.325,8.625 15.725,8.85 16.8,9.95
IMU_EN: Q1.2 R42.1 U1.28 | length 5.5
  TOP w0.127: R42.1@4.5,15.575 v1(4.5,16.125) ; R42.1@4.5,15.6 4.925,15.6 5.975,14.55 6.575,14.55 7.425,13.7 U1.28
  BOT w0.152: v1(4.5,16.125) 4.725,15.9 Q1.2
IMU_MISO: U1.16 U5.9 | length 9.5
  TOP w0.127: U5.9@9.8,20.325 v1@9.8,20.95 ; v1(11.4,17.05) 11.795,16.655 U1.16
  SIG w0.127: v1(9.8,21) 9.35,21.45 8.7,21.45 8.425,21.175 8.425,19.45 10.825,17.05 v1(11.4,17.05)
IMU_MOSI: U1.18 U5.24 | length 1.8
  TOP w0.127: U5.24@10.6,17.3 10.6,16.875 10.995,16.48 U1.18
IMU_SCLK: U1.20 U5.23 | length 1.6
  TOP w0.127: U1.20 10.195,16.3 U5.23@10.195,17.275
LED1: R63.1 U1.11 | length 4.5
  TOP w0.127: U1.11 v1(14.395,14.5)
  BOT w0.127: R63.1@12.55,13.8 R63.1@12.625,13.875 ; R63.1@12.55,13.95 13.225,13.95 13.875,13.3 14.65,13.3 14.8,13.45 14.8,14.095 v1(14.395,14.5)
LED2: R62.1 U1.47 | length 6.4
  TOP w0.127: v1@12.595,8.4 U1.47
  BOT w0.127: R62.1@12.525,11.525 13.4,11.525 13.975,10.95 13.975,9.3 13.075,8.4 v1@12.595,8.4
  other v1: 12.6,8.4
LED3: R33.2 R61.1 S1.2 U1.3 | length 10.1
  TOP w0.127: U1.3 v1(14.4,11.3) ; R33.2@13.975,8.85 14.554,8.271 S1.2
  BOT w0.127: R61.1@12.55,12.375 13.675,12.375 13.8,12.5 14.65,12.5 14.8,12.35 14.8,11.7 v1(14.4,11.3) 14.85,10.85 14.85,9.025 14.563,8.738 S1.2@14.563,7.366
LED_EN: Q1.5 R44.1 U1.25 | length 3.2
  TOP w0.152: U1.25 7.425,14.9 7.075,15.25 7.075,15.675 7.675,15.675 v1(7.925,15.425)
  BOT w0.152: Q1.5 7.45,15.9 v1(7.925,15.425)
NetC19_2: C19.2 U5.10 | length 2.2
  TOP w0.127: C19.2 8.583,21.425 9.175,21.425 9.4,21.2 U5.10@9.4,20.35
NetD1_2: D1.2 D4.1 | length 6.4
  BOT w0.127: D4.1@5.675,11.925 6.45,12.7 11.05,12.7 11.5,13.15 D1.2@11.525,13.15
NetR43_2: R43.2 R45.1 U11.1 | length 2.7
  TOP w0.152: v1@5.9,4.15 U11.1@6.375,4.15
  BOT w0.152: R45.1@4.975,4.8 4.975,4.45 5.275,4.15 R43.2@6.5,4.15 ; v1@5.875,4.175 v1@6,4.05
  other v1: 5.975,4.15
NFLASH_CS: R20.1 U1.48 U4.1 | length 2
  TOP w0.127: v1@12.995,9.1 U1.48
  BOT w0.152: U4.1@12.845,9.675 v1@12.995,9.1 ; U4.1@12.875,9.905 R20.1@12.875,10.75
  other v1: 13,9.1
NIMU_CS: R28.1 U1.22 U5.22 | length 2.8
  TOP w0.127: v1(9.2,16.55) 9.375,16.55 9.8,16.975 U5.22@9.8,17.3 ; v1@9.2,16.6 9.2,16.25 9.395,16.055 U1.22
  BOT w0.152: R28.1@8.775,17.125 8.775,17.025 v1@9.2,16.6
NIMU_INT: U1.42 U5.12 | length 18.2
  TOP w0.127: U5.12@8.6,20.35 8.6,20.6 v1(9,21) ; v1@10.595,9.1 U1.42
  SIG w0.127: v1(9,21) 9,20.4 10.175,19.225 11.45,19.225 13.875,16.8 13.875,15.725 13.05,14.9 13.05,10.25 12.475,9.675 11.17,9.675 v1@10.595,9.1
  other v1: 10.6,9.1
NLDO_INT: U1.43 | length 1.3
  TOP w0.127: v1@10.995,8.4 U1.43
  other v1: 11,8.4
Q2B: Q2.1 R32.1 | length 0.7
  BOT w0.152: R32.1@7.7,7.025 Q2.1@7.7,7.725
Q2C: Q2.3 R26.2 | length 1.6
  BOT w0.203: Q2.3@7.275,9.625 8.025,9.625 ; 8.075,9.625 R26.2@8.667,9.033
Q2E: Q1.4 Q2.2 R31.1 | length 15.7
  SIG w0.203: v1(6.475,16.9) 5.9,16.9 5.525,16.525 5.525,15.425 5.65,15.3 5.65,11.5 4.95,10.8 4.95,9.9 5.75,9.1 5.75,8.35 7.125,6.975 v1@7.125,6.4
  BOT w0.152: v1(6.475,16.9) 6.475,16.75 6.675,16.55 Q1.4
  BOT w0.203: R31.1@5.875,8.05 Q2.2@6.575,8.05 ; Q2.2 7.125,7.3 v1@7.125,6.4
  other v1: 7.125,6.2
R/GB: R69.1 U1.14 | length 2
  TOP w0.127: U1.14 R69.1@12.595,17.65
RGB_EN: D2.2 U1.17 U12.6 | length 4.3
  TOP w0.127: U1.17@11.4,15.7 v1(11.4,16.3)
  BOT w0.127: U12.6 9.55,17.1 9.875,16.775 10.925,16.775 v1(11.4,16.3) D2.2@12.675,16.3
RXD: P2.5 U1.27 | length 8.9
  TOP w0.127: P2.5@4.89,20.695 4.225,20.03 4.225,17.025 5.15,16.1 5.15,15.75 6.1,14.8 6.725,14.8 7.425,14.1 U1.27
SCL: RTC0.8 U1.40 | length 2
  TOP w0.127: RTC0.8@9.795,7.725 U1.40
  other v1: 9.8,9.1
SDA: RTC0.1 U1.41 | length 3.3
  TOP w0.127: RTC0.1@10.025,6.625 10.025,6.725 10.325,7.025 10.325,7.925 10.195,8.055 U1.41
  other v1: 10.2,8.4
SW: R34.1 S1.1 | length 1.6
  TOP w0.127: R34.1@13.975,16.675 14.554,17.254 S1.1
SWDCLK: P2.6 U1.24 | length 7.3
  TOP w0.127: P2.6@6.175,20.62 5.525,19.97 5.525,17.675 5.9,17.3 7.375,17.3 8.595,16.08 U1.24
SWDIO: P2.2 U1.23 | length 4
  TOP w0.127: P2.2@6.175,18.08 6.705,17.55 7.525,17.55 8.995,16.08 U1.23
TRIM: R67.1 U1.15 | length 1.4
  TOP w0.127: U1.15@12.2,15.7 R67.1@12.2,17.05
TXD: P2.1 U1.26 | length 5.8
  TOP w0.127: 4.43,17.225 4.43,17.67 P2.1 ; 4.437,17.213 5.45,16.2 5.45,15.825 6.225,15.05 6.875,15.05 7.425,14.5 U1.26
  SIG w0.127: P2.1@4.9,18.075 P2.1@4.905,18.08
VBAT: C22.2 POS.1 R23.2 R26.1 R27.1 R34.2 TP.1 | length 25
  TOP w0.127: R34.2@14.925,16.65 TP.1@15.725,16.65
  TOP w0.152: TP.1@16.65,15.375 16.65,14.9 17,14.55 R23.2@17,14.175
  TOP w0.254: v1(9.95,4.25) R27.1@9.95,4.775
  SIG w0.254: v1(9.95,4.25) 9.25,4.25 8.575,4.925 8.575,5.775 9.395,6.595 9.395,8.4 9.125,8.67 9.125,9.225 9.95,10.05 12.2,10.05 12.65,10.5 12.65,15.15 13.425,15.925 v1(13.425,16.375)
  BOT w0.203: R26.1@8.75,8.067 8.892,8.067 9.225,8.4 v1(9.4,8.4)
  BOT w0.254: v1(13.425,16.375) 13.725,16.675 15.6,16.675 v3(15.725,16.55)
  BOT w0.508: POS.1@16.213,15.827 cw(c7.62,12.7) C22.2@16.729,13.497
  other v3: 16.2,15.225 16.8,15.45 16.325,16.775
VDD_PA: B1.5 C8.2 U1.30 | length 2.4
  TOP w0.203: B1.5@6.2,12.7 6.2,13.35 6.725,13.35 7.175,12.9 7.375,12.9 ; 7.395,12.9 U1.30
VER_EN: R22.1 R30.1 U1.4 | length 4.1
  TOP w0.127: U1.4 14.8,11.7 16.2,11.7 16.325,11.575 ; R30.1@16.325,11.225 16.325,11.575 ; R22.1 17,11.575 16.875,11.7 16.45,11.7 16.325,11.575
VIMU: C20.2 Q1.6 R28.2 U5.8 U5.13 | length 13.8
  TOP w0.127: U5.13 10.025,19.725 10.2,19.9 U5.8
  TOP w0.152: C20.2@7.375,18.875 v1(7.375,19.425) 7.675,19.725 U5.13
  SIG w0.203: v1(6.425,15.5) 6.85,15.5 7.4,16.05 7.4,16.825 7.9,17.325 7.9,19.275 7.75,19.425 v1(7.375,19.425)
  BOT w0.127: v1(6.425,15.5) 6.425,16.35 5.975,16.725 5.975,17.075 6.275,17.375 6.775,17.375 7.025,17.125 R28.2@7.75,17.125
  BOT w0.152: v1(6.425,15.5) 6.675,15.25 Q1.6
VLED: C60.2 L1.1 Q1.3 U12.1 | length 10.3
  SIG w0.203: v1(6.025,16.075) 6.5,16.075 6.925,16.5 6.925,19.925 7.05,20.05 v1(7.375,20.05)
  BOT w0.152: Q1.3@5.3,16.55 Q1.3@5.6,16.55 ; Q1.3@5.55,16.55 v1(6.025,16.075)
  BOT w0.254: L1.1@7.725,21.025 L1.1@8.15,21.025 ; C60.2@8.863,20.262 9.55,19.575 U12.1
  BOT w0.305: v1(7.375,20.05) 8.65,20.05 8.888,20.288 L1.1@8.15,21.025
VMCU: C1.2 C2.2 C6.2 C7.2 C17.2 C18.2 C21.2 P2.3 Q1.1 R14.2 R16.2 R20.2 R29.2 R31.2 R32.2 R42.2 R44.2 R45.2 RTC0.5 U1.1 U1.12 U1.29 U1.35 U1.36 U4.8 U11.5 | length 69.5
  TOP w0.127: R42.2@4.5,14.65 v1(5.15,14.65) ; v1(5.15,17.1) 5.675,16.575 6.15,16.575 6.25,16.475 R44.2@7.075,16.475 ; U1.12 14.025,14.9 v1@14.287,15.162 ; C1.2@14.9,15.15 14.975,15.075 15.35,15.075 15.825,14.6 16.25,14.6 16.35,14.5 R29.2@16.35,14.175
  TOP w0.152: v1(7.2,10.5) U1.36 ; U1.35@7.55,10.9 U1.35 ; U1.1 v1(14.4,10.5)
  TOP w0.178: v1(9.1,5.15) 9.5,5.15 9.6,5.25 11.75,5.25 12.125,5.625 12.125,7.025 RTC0.5@12.625,7.525 ; RTC0.5@12.775,7.375 C21.2@13.5,7.375
  TOP w0.203: v1@6.45,14.125 7.275,13.3 U1.29 ; v1@14.287,15.162 C1.2@14.913,15.162 ; v1(14.4,10.5) C2.2@15,10.5
  TOP w0.254: C17.2@5.2,6.05 U11.5@6.375,6.05 ; C17.2@5.225,6.075 v1(5.225,6.8) ; C17.2@5.25,6.075 5.213,6.037 5.7,5.55 6.75,5.55 6.85,5.65 7.4,5.65 7.9,5.15 v1(9.1,5.15) ; C17.2@5.325,6.175 v1@5.713,6.562
  TOP w0.305: C7.2@6.025,14.05 v1@6.421,14.05
  TOP w0.406: C6.2@6.65,10.5 v1(7.2,10.5) ; v1@7.2,10.575 7.325,10.7 7.85,10.7
  SIG w0.152: P2.3@4.89,19.425 5.525,18.79 5.525,17.475 v1(5.15,17.1) v1(5.15,14.65)
  SIG w0.178: v1(5.15,14.65) 4.625,14.65 4.25,14.275 4.25,10.95 4.45,10.75 4.45,7.65 5.225,6.875 v1(5.225,6.8)
  SIG w0.305: v1(9.1,5.15) 10.75,6.8 11.775,6.8 13.575,8.6 v1(13.575,9.675) v1(14.4,10.5) 13.488,11.412 ; 13.48,11.42 13.488,11.412 ; 13.488,11.407 13.488,11.412 ; v1@14.287,15.162 13.488,14.363 13.488,11.412
  SIG w0.356: v1@5.825,6.525 5.825,6.1 6.3,5.625 7.5,5.625 7.825,5.95 7.825,7.575 7.25,8.15 7.25,9.4 ; v1(6.425,14.125) 6.913,13.638
  BOT w0.152: R45.2@4.975,5.75 4.975,6.075 5.225,6.325 v1@5.225,6.725 ; v1(5.15,14.65) Q1.1@5.15,15.15 ; R31.2@5.925,7 R32.2@6.625,7 ; R14.2@11.275,10.625 11.875,10.625 11.875,10.675 12.275,11.075 13.25,11.075 13.575,10.75 13.575,9.95 ; R16.2@12.55,14.775 13.175,14.775 13.563,15.162 ; U4.8@12.87,15.5 13.225,15.5 13.563,15.162 ; v1@14.363,15.162 13.563,15.162
  BOT w0.203: v1@5.825,6.65 R31.2@5.825,7.15
  BOT w0.254: C18.2@5.825,5.4 v1@5.825,6.65
  other v1: 5.825,6.6 14.325,15.15
VRGB: C61.2 D4.2 R2.1 R25.2 R60.2 TP1.1 U12.4 | length 27.5
  TOP w0.127: v1@11.825,17.675 R60.2@11.825,18.3 ; v1(15.075,14.5) 15.075,14.45 15.35,14.175 R25.2@15.7,14.175
  SIG w0.127: 13.9,11.9 13.9,13.9 14.1,14.1 14.675,14.1 v1(15.075,14.5) ; 13.905,11.9 14.105,11.7 14.68,11.7 15.08,11.3 v1(15.1,11.3)
  SIG w0.305: v1(7.925,16.15) 8.6,16.15 9.075,15.675 11.825,15.675 12.25,16.1 12.25,17.175 v1(11.825,17.6)
  BOT w0.127: v1@11.825,17.65 11.825,17.225 12.2,16.85 12.75,16.85 12.975,16.625 12.975,16.15 13.55,15.575 14.8,15.575 15.075,15.3 v1(15.075,14.5) ; C61.2 11.825,18.45 11.975,18.6 12.425,18.6 12.575,18.75 R2.1@12.575,19.083 ; v1@15.08,11.3 v1(15.1,11.3)
  BOT w0.254: D4.2@5.675,13.425 5.675,14.225 6.175,14.725 7.625,14.725 8,14.35 8.475,14.825 8.475,15.675 8.15,16 ; U12.4 10.85,17.975 11,18.125 C61.2@11.975,18.125 ; v1@11.825,17.65 C61.2@11.825,18.125
VSYS: C24.2 R27.2 U11.4 | length 2.5
  TOP w0.254: U11.4@7.75,6.3 8.15,6.3 v1(8.438,6.588) 8.888,6.588 9.075,6.4 C24.2@9.075,5.95 ; C24.2@9.35,5.775 R27.2@9.9,5.775
XC1: C4.2 U1.37 X1.1 | length 3.2
  TOP w0.152: X1.1@5.951,8.875 6,8.875 6.45,9.325 6.85,9.325 7.35,9.825 8,9.825 8.275,9.55 U1.37@8.6,9.55
XC2: C5.2 U1.38 X1.3 | length 3.6
  TOP w0.152: X1.3@6.9,7.475 C5.2@7.966,8.541 ; X1.3@6.901,7.525 X1.3@6.901,7.601 ; C5.2 7.95,8.875 8.225,9.15 8.845,9.15 8.995,9.3 U1.38
pads on no net: RTC0.4 RTC0.7 TP2.1 U5.1 U5.2 U5.3 U5.4 U5.5 U5.6 U5.14 U5.15 U5.16 U5.17 U5.19 U11.3 X1.2 X1.4

## Polygon pours and split planes (outlines as drawn)
VMCU on SIG "Bottom-Power" (solid, pour order 2): 6.4,13.4 7.9,14.9 11.2,14.9 12.2,13.9 12.2,10.8 11.9,10.5 9.7,10.5 8.5,9.3 6.9,9.3 6.4,9.8
GND on GND "Bottom-Power" (solid, pour order 9): 3.557,3.391 ccw(c7.641,12.694) 3.556,21.996

## Other copper
TOP:
  text "1" at 25.4,8.382 h1.52 r90
GND:
  pour cut-out: 3.55,7.875 3.55,7.45 3.825,7.45 ccw(c3.825,7.875) 4.25,7.875
  pour cut-out: 3.55,7.875 3.55,8.3 3.825,8.3 cw(c3.825,7.875) 4.25,7.875
  text "2" at 25.4,10.287 h1.52 r90
SIG:
  text "3" at 25.4,12.7 h1.52 r90
BOT:
  text "4" at 25.4,15.367 h1.52 r90

## Silkscreen, mask and mechanical layers (free items; w line width, h text height)
Top Overlay:
  region: 1.941,11.947 0.943,11.947 cw(c0.943,12.28) 0.61,12.28 0.61,12.946 cw(c0.943,12.946) 0.943,13.279 1.609,13.279 cw(c1.609,12.946) 1.941,12.946 1.941,11.947 1.773,12.613 cw(c1.276,12.613) 1.276,12.116 cw(c1.276,12.613) 0.779,12.613 cw(c1.276,12.613) 1.276,13.11 cw(c1.276,12.613) 1.773,12.613
  region: 1.276,12.946 1.276,12.28 ccw(c1.276,12.613) 1.609,12.613 ccw(c1.276,12.613) 1.276,12.946
  lines w0.01: 0.61,12.28 ccw(c0.943,12.28) 0.943,11.947 1.941,11.947 1.941,12.613 1.941,12.946 ccw(c1.609,12.946) 1.609,13.279 0.943,13.279 ccw(c0.943,12.946) 0.61,12.946 0.61,12.28 ; 0.779,12.613 ccw(c1.276,12.613) 1.276,12.116 ccw(c1.276,12.613) 1.773,12.613 ccw(c1.276,12.613) 1.276,13.11 ccw(c1.276,12.613) 0.779,12.613 ; 1.276,12.28 ccw(c1.276,12.613) 1.609,12.613 ccw(c1.276,12.613) 1.276,12.946 1.276,12.28
  text "Hello Inc" at 1.8,13.9 h0.7 r90
  text "905-00007-05" at 0.1,8.4 h0.7 r90
  text "(C) 2014" at 1.7,6.375 h0.7 r90
Drill Guide:
  lines w0.152: 27.175,48.46 27.175,49.73 53.845,49.73 53.845,48.46 27.175,48.46 ; 27.205,50.8 53.875,50.8 53.875,52.07 27.205,52.07 27.205,50.8 ; 27.205,60.96 27.205,62.23 53.875,62.23 53.875,60.96 27.205,60.96 ; 27.23,62.96 27.23,64.23 53.9,64.23 53.9,62.96 27.23,62.96 ; 27.305,54.61 53.975,54.61 53.975,58.42 27.305,58.42 27.305,54.61
Mechanical 1:
  lines w0.254: -3.606,17.999 ccw(c12.7,12.7) -3.603,7.394 ; 2.655,21.564 ccw(c7.62,12.7) 2.675,3.825 ; 2.667,3.81 cw(c3.175,3.81) 3.683,3.81 3.683,3.302 ; 2.667,21.59 ccw(c3.175,21.59) 3.683,21.59 3.683,22.098 ; 3.694,3.329 ccw(c7.62,12.7) 3.694,22.071 ; 12.7,3.901 cw(c14.19,1.538) 16.983,1.524 16.983,0 ; 12.7,21.499 ccw(c14.19,23.862) 16.983,23.876 16.983,25.4 ; 16.582,7.811 ccw(c12.501,12.675) 16.582,17.539 ; 45.856,21.558 ccw(c50.821,12.694) 45.876,3.818 ; 46.737,3.391 ccw(c50.821,12.694) 46.736,21.996 46.736,3.404
Mechanical 13:
  circle w0.254: c13.135,12.8 r0.635
  lines w0.5: -1.691,10.178 1.206,10.556 ccw(c15.04,12.5) 1.611,8.649 -0.739,7.866 ; -1.687,10.179 cw(c7.42,12.5) -1.978,12.516 1.07,12.5 cw(c15.04,12.5) 1.206,14.444 -1.667,14.899 ; -1.667,14.898 cw(c7.42,12.5) -0.81,17.038 ; -0.81,17.038 1.628,16.416 ; -0.742,7.864 ccw(c7.457,12.457) 2.598,4.412 ; 0.481,8.267 ccw(c7.42,12.5) 1.921,6.515 ; 0.589,18.969 2.348,18.337 ; 0.596,18.962 cw(c7.42,12.5) 2.03,20.198 ; 1.63,16.416 cw(c15.04,12.5) 2.347,18.334 ; 1.916,6.52 3.2,7.674
  lines w0.508: 3.808,4.593 cw(c3.171,3.801) 4.176,3.956 ccw(c7.62,12.7) 4.176,21.444 cw(c3.171,21.599) 3.808,20.807 3.808,4.593
Mechanical 15:
  circle w0.254: c14.554,18.034 r0.254
  circle w0.254: c14.554,7.366 r0.254
  lines w0.254: 2.365,7.7 -0.635,7.7 -0.635,9.7 2.365,9.7 2.365,11.7 -0.635,11.7 -0.635,13.7 2.365,13.7 2.365,15.7 -0.635,15.7 -0.635,17.7 2.365,17.7 ; 13.792,7.62 13.792,17.78 ; 14.554,6.35 14.554,19.05 ; 15.316,7.62 15.316,17.78
  lines w1.016: 2.54,7.62 12.7,7.62 12.7,17.78 2.54,17.78 2.54,7.62
Drill Drawing:
  drawing of 1870 lines, arcs and shapes, not listed
  text "6" at 87.311,247.233 h2.38
  text "5" at 137.603,247.247 h2.38
  text "2" at 288.03,247.219 h2.38
  text "4" at 188.038,247.205 h2.38
  text "8" at -14.025,247.1 h2.38
  text "1" at 339.5,247.063 h2.38
  text "3" at 238.036,247.049 h2.38
  text "7" at 37.839,247.027 h2.38
  text "D" at 366.524,213.051 h2.38
  text "D" at -41.469,212.201 h2.38
  text "Layer" at -10.419,182.896 h1.52
  text "Name" at -0.007,182.896 h1.52
  text "Material" at 23.609,182.896 h1.52
  text "Thickness" at 45.447,182.896 h1.52
  text "Constant" at 61.952,182.896 h1.52
  text "Board Layer Stack" at 76.427,182.896 h1.52
  text "1" at -10.419,179.848 h1.52
  text "Top Paste" at -0.007,179.848 h1.52
  text "2" at -10.419,176.8 h1.52
  text "Top Overlay" at -0.007,176.8 h1.52
  text "3" at -10.419,173.752 h1.52
  text "Top Solder" at -0.007,173.752 h1.52
  text "Solder Resist" at 23.609,173.752 h1.52
  text "0.010mm" at 45.447,173.752 h1.52
  text "3.5" at 61.952,173.752 h1.52
  text "4" at -10.419,170.704 h1.52
  text "TOP" at -0.007,170.704 h1.52
  text "Copper" at 23.609,170.704 h1.52
  text "0.0177mm" at 45.447,170.704 h1.52
  text "5" at -10.419,167.656 h1.52
  text "Dielectric1" at -0.007,167.656 h1.52
  text "FR-4" at 23.609,167.656 h1.52
  text "0.252mm" at 45.447,167.656 h1.52
  text "4.2" at 61.952,167.656 h1.52
  text "6" at -10.419,164.608 h1.52
  text "GND" at -0.007,164.608 h1.52
  text "Copper" at 23.609,164.608 h1.52
  text "0.0177mm" at 45.447,164.608 h1.52
  text "7" at -10.419,161.56 h1.52
  text "Dielectric3" at -0.007,161.56 h1.52
  text "FR-4" at 23.609,161.56 h1.52
  text "0.130mm" at 45.447,161.56 h1.52
  text "4.2" at 61.952,161.56 h1.52
  text "8" at -10.419,158.512 h1.52
  text "SIG" at -0.007,158.512 h1.52
  text "Copper" at 23.609,158.512 h1.52
  text "0.0177mm" at 45.447,158.512 h1.52
  text "9" at -10.419,155.464 h1.52
  text "Dielectric2" at -0.007,155.464 h1.52
  text "FR-4" at 23.609,155.464 h1.52
  text "0.252mm" at 45.447,155.464 h1.52
  text "4.2" at 61.952,155.464 h1.52
  text "10" at -10.419,152.416 h1.52
  text "BOT" at -0.007,152.416 h1.52
  text "Copper" at 23.609,152.416 h1.52
  text "0.0177mm" at 45.447,152.416 h1.52
  text "11" at -10.419,149.368 h1.52
  text "Bottom Solder" at -0.007,149.368 h1.52
  text "Solder Resist" at 23.609,149.368 h1.52
  text "0.010mm" at 45.447,149.368 h1.52
  text "3.5" at 61.952,149.368 h1.52
  text "C" at -41.502,147.502 h2.38
  text "C" at 366.012,147.369 h2.38
  text "12" at -10.419,146.32 h1.52
  text "Bottom Overlay" at -0.007,146.32 h1.52
  text "13" at -10.419,143.272 h1.52
  text "Bottom Paste" at -0.007,143.272 h1.52
  text "Symbol" at -2.546,122.491 h1.83
  text "Hit Count" at 10.303,122.491 h1.83
  text "Finished Hole Size" at 28.028,122.491 h1.83
  text "Plated" at 62.206,122.491 h1.83
  text "Hole Type" at 75.055,122.491 h1.83
  text "130" at 10.303,92.011 h1.52
  text "0.254mm (10mil)" at 28.028,92.011 h1.52
  text "PTH" at 62.206,92.011 h1.52
  text "Round" at 75.055,92.011 h1.52
  text "Fabrication / Assembly Notes" at 200.171,89.485 h1.52
  text "8" at 10.303,88.201 h1.52
  text "0.711mm (28mil)" at 28.028,88.201 h1.52
  text "PTH" at 62.206,88.201 h1.52
  text "Round" at 75.055,88.201 h1.52
  text "1. Material: Rigid FR-4, RoHS compliant: material should meet or exceed requirements of IPC 4101/129" at 200.171,86.485 h1.52
  text "142 Total" at 10.303,84.391 h1.52
  text "B" at -41.525,83.568 h2.38
  text "2. Number of electrical layers: 4" at 200.171,83.485 h1.52
  text "B" at 367.036,83.208 h2.38
  text "3. Trace / Space minimum: 5mil (all layers)" at 200.171,80.485 h1.52
  text "4. Thickness: 0.78mm (finished)" at 200.171,77.485 h1.52
  text "5. Finish:  ENIG plating on exposed copper" at 200.171,74.485 h1.52
  text "6. Soldermask: per IPC-SM-840, color violet registration within +/- 0.076mm of circuit layer" at 200.171,71.485 h1.52
  text "7. Silkscreen: do print silkscreen on top and bottom layers" at 200.171,68.485 h1.52
  text "0.5oz Cu" at 62.21,65.486 h2.54
  text "8. Board must meet or exceed 94V-0" at 200.171,65.485 h1.52
  text "TOP Layer" at 11.43,64.865 h1.52
  text "5 mil PrePreg" at 35.993,63.214 h0.76
  text "9. Board must be lead free process compatible and able to withstand minimum of" at 200.171,62.485 h1.52
  text "5 mil PrePreg" at 35.968,61.214 h0.76
  text "0.5oz Cu" at 61.976,60.706 h2.54
  text "GND Layer" at 11.43,59.69 h1.52
  text "5 cycles at 250 degrees celsius" at 204.671,59.485 h1.52
  text "10. All Test/QA/QC markings to be made on back side of PCB" at 200.171,56.485 h1.52
  text "_" at 70.993,56.007 h2.54
  text "5mil Core" at 36.576,55.88 h0.76
  text "+" at 70.993,55.626 h2.54
  text "0.028" at 58.166,55.372 h2.54
  text "0.5 mils" at 74.422,55.372 h2.54
  text "11. x mousebites shall be no larger than 0.05 mm" at 200.168,53.423 h1.52
  text "SIG Layer" at 11.43,53.34 h1.52
  text "5 mil PrePreg" at 35.968,51.054 h0.76
  text "0.5oz Cu" at 62.23,50.292 h2.54
  text "12. 0.25mm radius around sharp edges like the notch on the right side" at 200.171,50.285 h1.52
  text "5 mil PrePreg" at 35.938,48.714 h0.76
  text "BOT Layer" at 11.43,48.26 h1.52
  text "0.5oz Cu" at 62.51,45.886 h2.54
  text "2 X" at 5.08,38.1 h3.18
  text "4.45mm" at 16.764,38.1 h3.18
  text "_" at 18.034,33.528 h3.18
  text "+" at 18.034,33.147 h3.18
  text "0.1mm" at 21.209,32.639 h3.18
  text "DRAFTER" at 250.735,30.032 h1
  text "DATE" at 274.25,30.032 h1
  text "METRIC" at 226.931,29.182 h1.78
  text "Top Side Compenent Designators" at -3.683,28.829 h0.76
  text "TITLE:" at 294.313,27.886 h2.54
  text "DIMENSIONS ARE IN MILLIMETERS" at 216.541,24.411 h1
  text "DESIGNER" at 250.944,22.862 h1
  text "DATE" at 274.25,22.862 h1
  text "TOLERANCES:" at 216.541,21.94 h1
  text "D Shaffer" at 253.9,19.7 h1.78
  text "12/30/14" at 276.104,19.604 h1.78
  text "0.05" at 237.792,19.241 h1.5
  text "0 > - < 2" at 220.374,19.134 h1.5
  text "A" at 366.289,17.004 h2.38
  text "2 X" at 30.48,16.764 h3.18
  text "A" at -41.535,16.578 h2.38
  text "2 > - < 10" at 220.302,16.327 h1.5
  text "0.08" at 237.792,16.327 h1.5
  text "10 > - < 50" at 219.193,13.303 h1.5
  text "0.10" at 237.792,13.303 h1.5
  text "PROPRIETARY AND CONFIDENTIAL" at 250.468,12.814 h1.5
  text "8.9mm" at 30.48,12.192 h3.18
  text "50 > - < 100" at 219.267,10.332 h1.5
  text "0.15" at 237.792,10.332 h1.5
  text "Pill Motion Sensor" at 301.4,10.2 h3
  text "_" at 29.083,8.636 h3.18
  text "+" at 29.083,8.255 h3.18
  text "THE INFORMATION CONTAINED IN" at 253.245,7.823 h1.25
  text "0.1mm" at 32.153,7.773 h3.18
  text "100 > - < 200" at 218.158,7.254 h1.5
  text "0.20" at 237.792,7.254 h1.5
  text "THIS DRAWING IS THE SOLE" at 253.245,5.073 h1.25
  text "200 > -" at 218.158,3.809 h1.5
  text "0.20" at 237.792,3.809 h1.5
  text "2 X" at -20.088,2.704 h3.18
  text "PROPERTY OF HELLO INC." at 253.245,2.323 h1.25
  text "ANGLES" at 220.364,-0.755 h1.5
  text "1.00" at 237.792,-0.777 h1.5
  text "R0.40mm" at -23.162,-2.316 h3.18
  text "SIZE" at 294.125,-2.577 h2
  text "DWG.  NO." at 304.938,-2.614 h2
  text "REV" at 351.93,-2.711 h2
  text "ANY REPRODUCTION IN PART OR" at 253.245,-3.177 h1.25
  text "AS A WHOLEWITHOUT THE" at 253.245,-5.927 h1.25
  text "201-00007-05" at 311.175,-7.15 h1.52
  text "0.10mm" at -20.178,-8.244 h3.18
  text "+" at -23.353,-8.371 h3.18
  text "WRITTEN PERMISSION OF HELLO" at 253.245,-8.677 h1.25
  text "20.6mm" at 12.7,-9.652 h3.18
  text "B" at 295.388,-10.589 h6.35
  text "_" at -23.353,-11.292 h3.18
  text "INC IS PROHIBITED." at 253.245,-11.427 h1.25
  text "0.00mm" at -20.178,-13.324 h3.18
  text "_" at 11.303,-13.716 h3.18
  text "+" at 11.303,-14.097 h3.18
  text "0.1mm" at 14.732,-14.732 h3.18
  text "SHEET 1 OF 1" at 339.976,-16.162 h2
  text "SCALE: 2:1" at 294.294,-16.17 h2
  text "WEIGHT:" at 316.188,-16.264 h2
  text "4" at 186.236,-19.875 h2.38
  text "8" at -13.576,-20.071 h2.38
  text "7" at 38.003,-20.064 h2.38
  text "6" at 87.822,-20.054 h2.38
  text "5" at 137.766,-20.132 h2.38
  text "1" at 339.016,-20.366 h2.38

## Text inside footprints (layer, text, board x,y; h text height)
D4: Mechanical 15 "R" at 7.65,12.5 h0.4; Mechanical 15 "G" at 6.922,12.9 h0.4; Mechanical 15 "B" at 6.922,12.1 h0.4